# Altium PCB MainCard.PcbDoc
Units mil, origin at the board's own origin, x right, y up, seen from the top; angles counter-clockwise.
Board outline 6407.48 x 3828.74 mil, 2 copper layers (Top Layer, Bottom Layer); 29 components, 25 nets, 193 pads, 14 vias.
Unrouted connection lines stored in the file: 15.
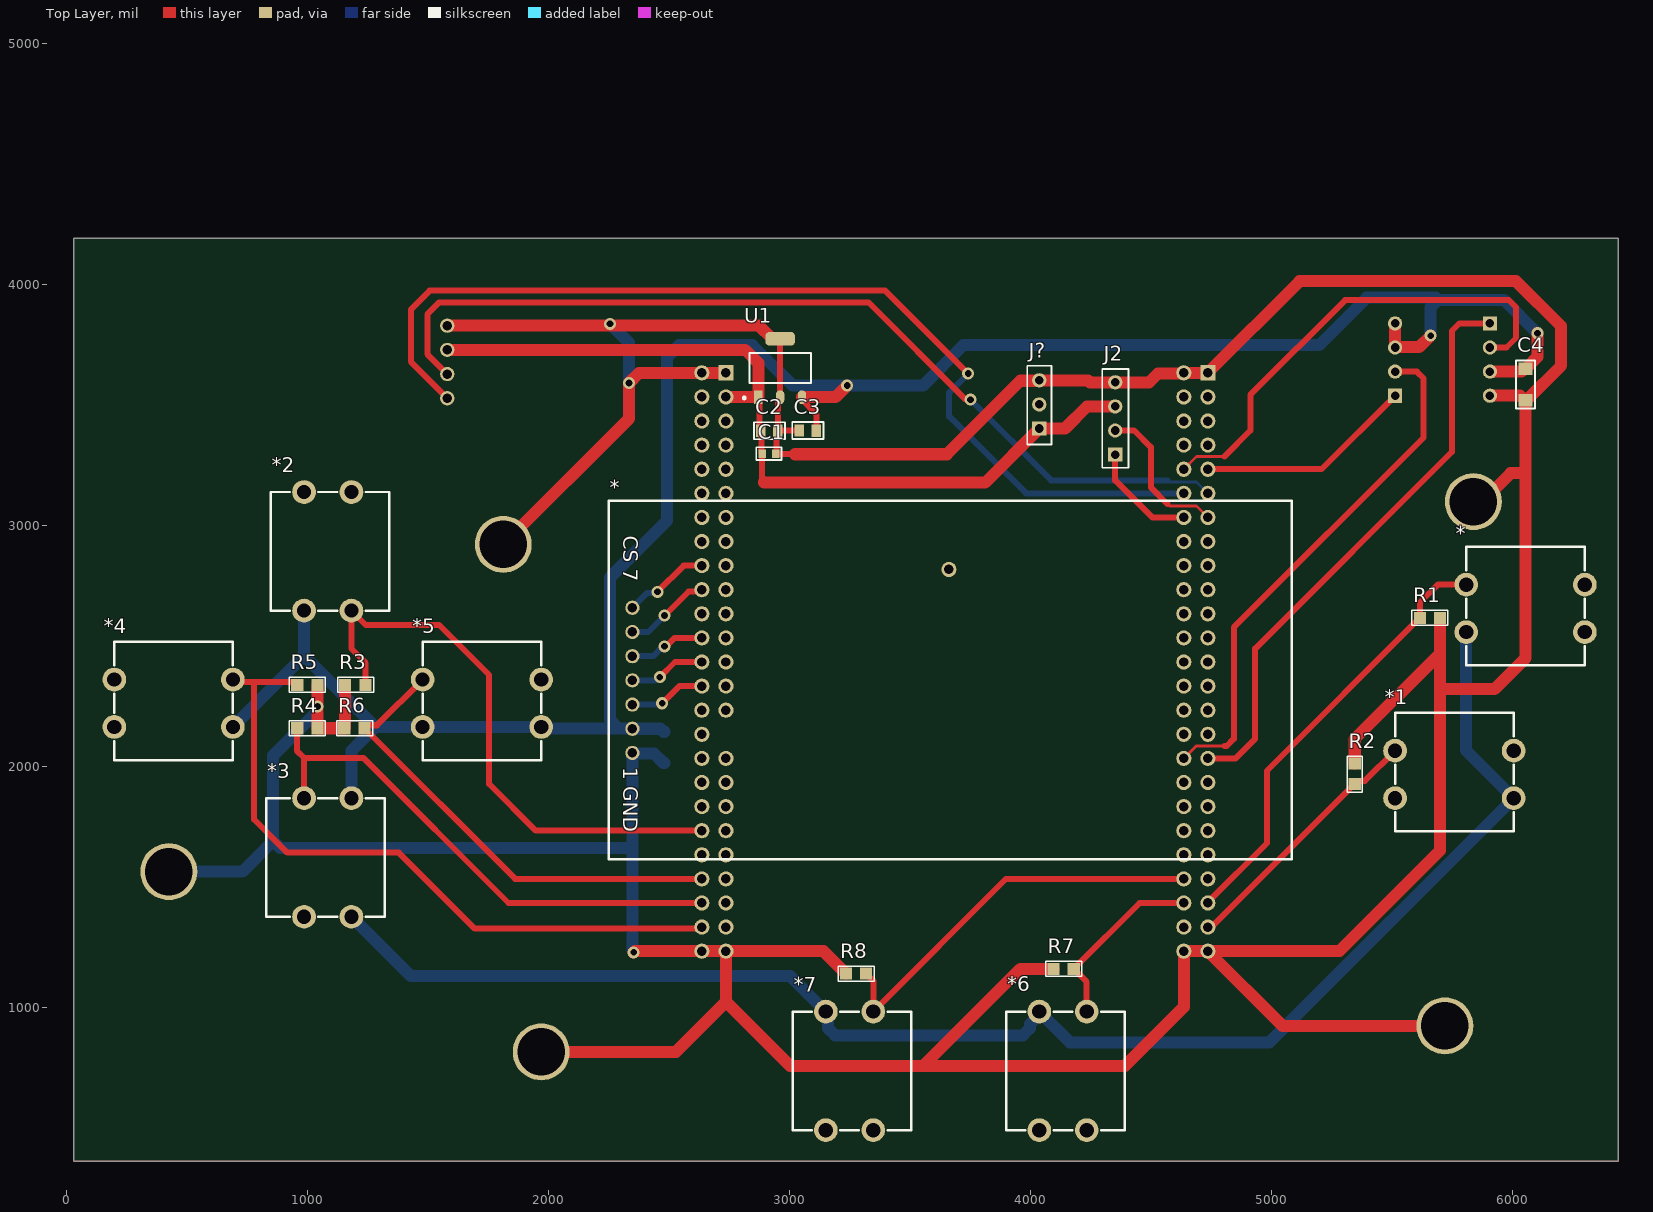
[diagram p0: Top Layer view]
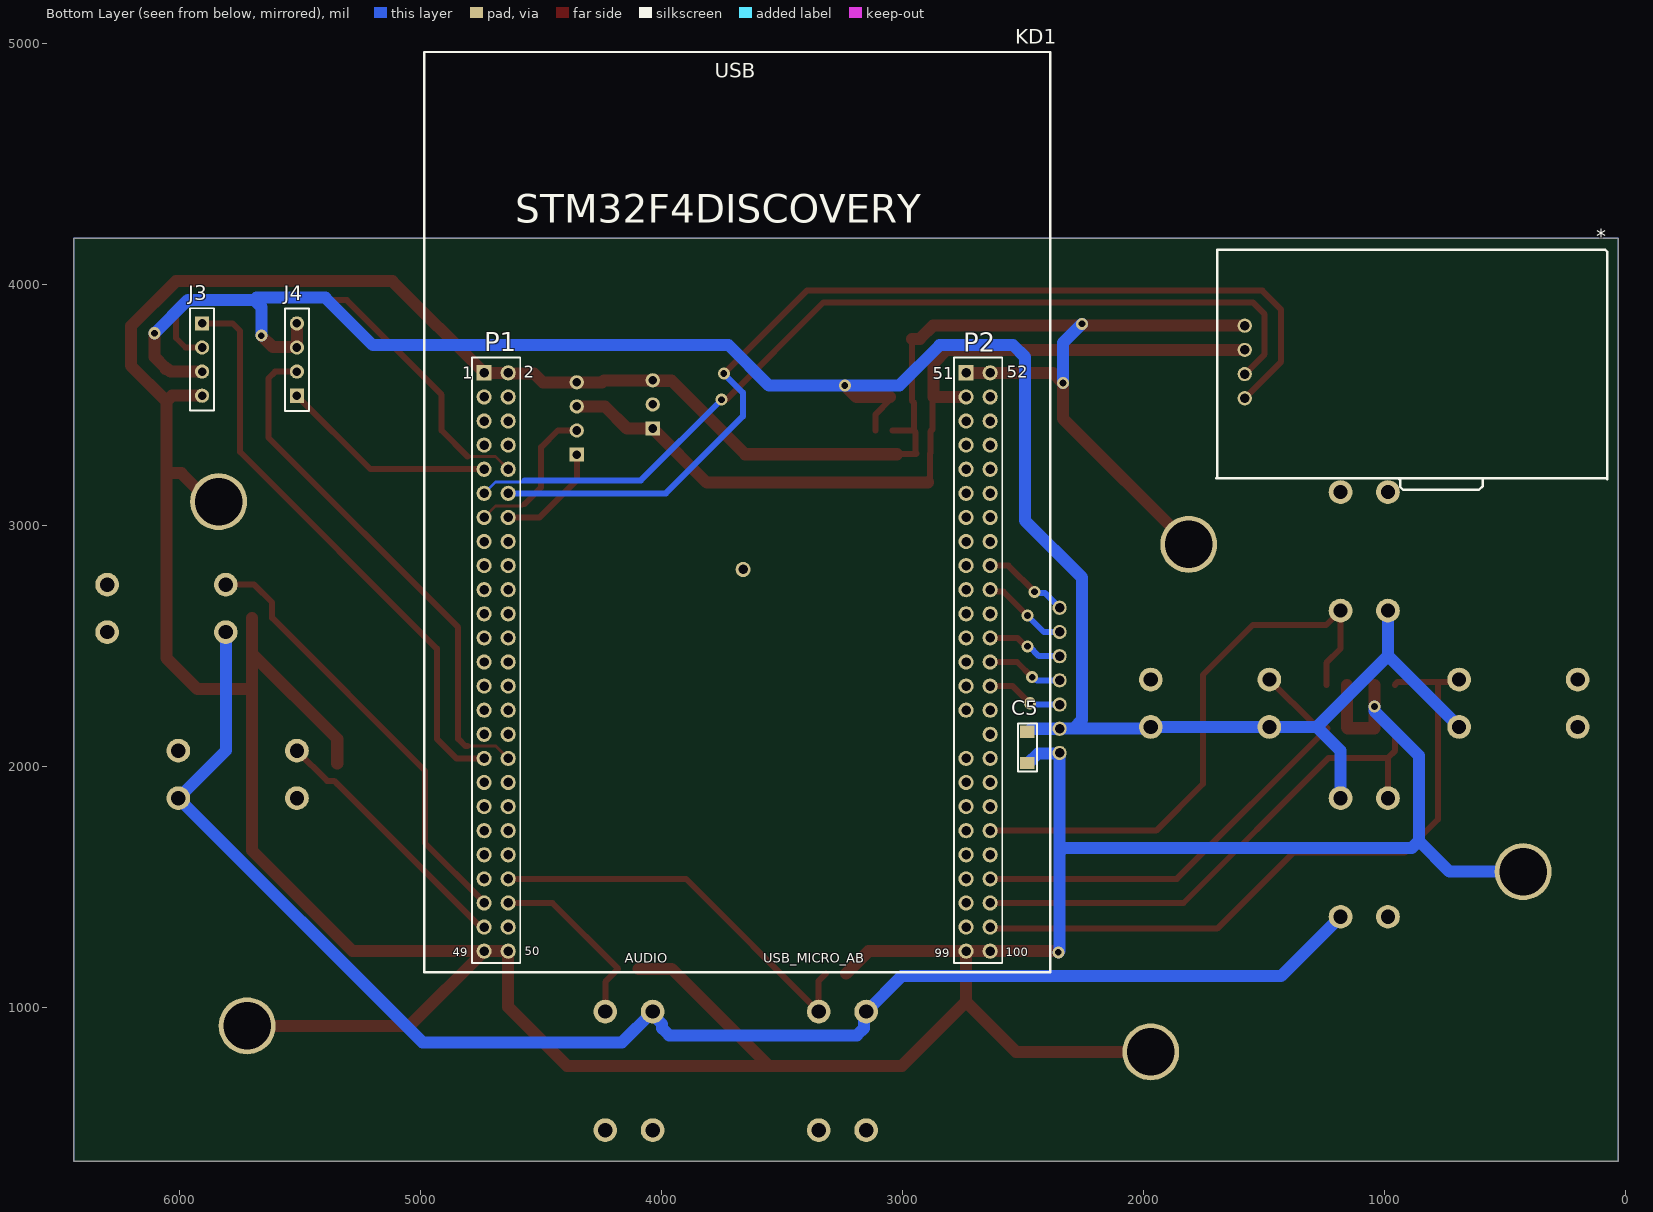
[diagram p1: Bottom Layer view, seen from below]
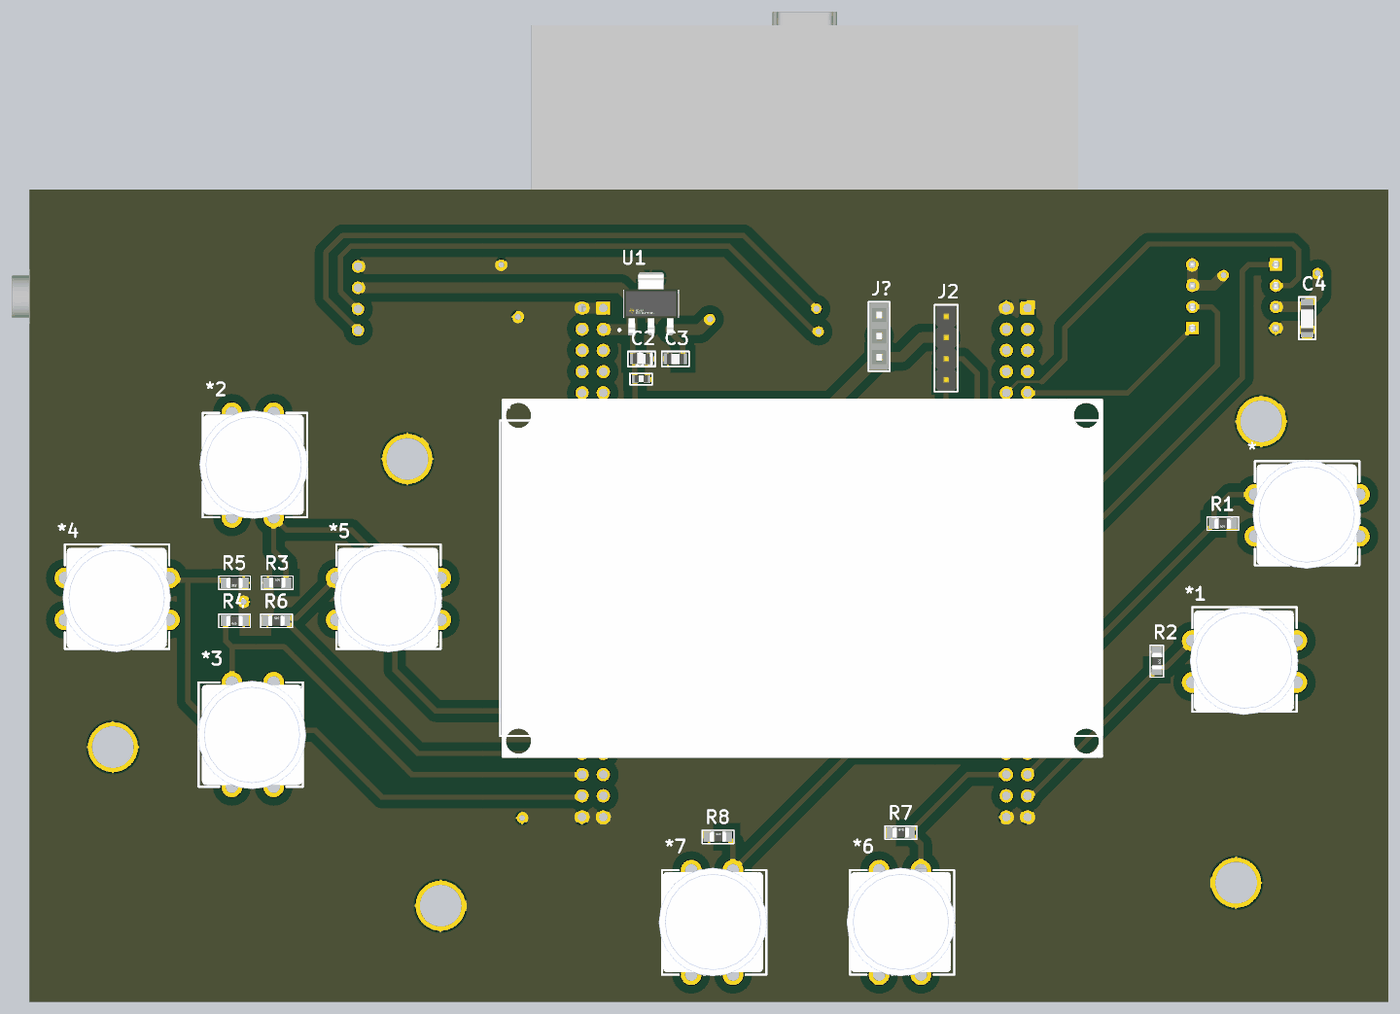
[diagram p2: 3D render of the assembled board from above, using the file's embedded part models]
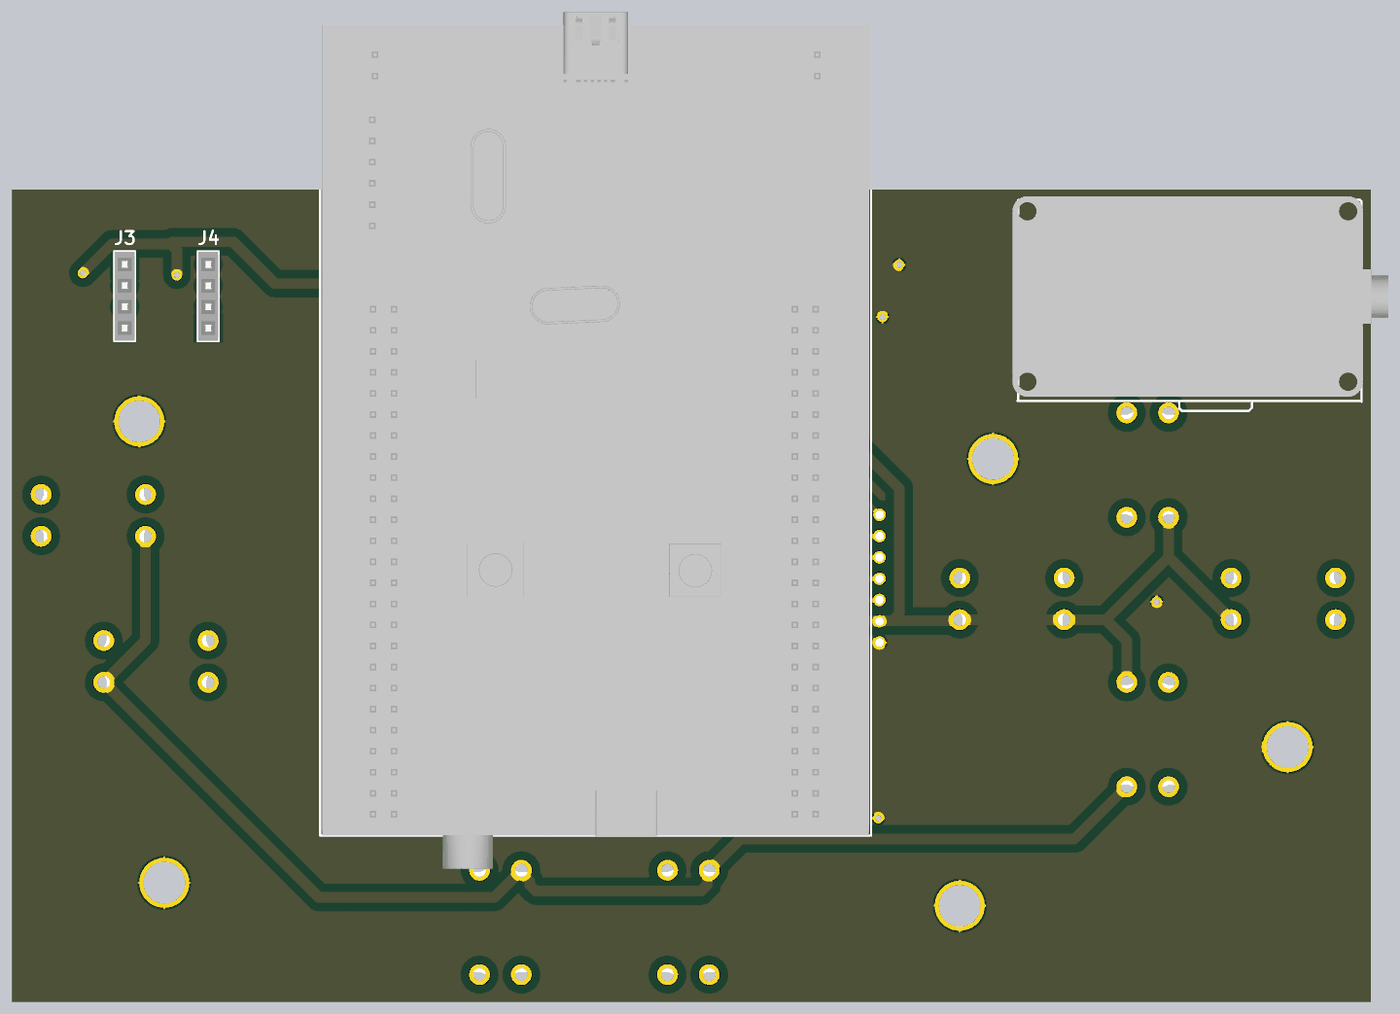
[diagram p3: 3D render of the assembled board from below, using the file's embedded part models]

## Layer stack, top to bottom
Top Solder: solder mask 0.4, Solder Resist, Dk 3.5
Top Layer: signal copper 1.4
Dielectric 1: dielectric 12.6, FR-4, Dk 4.8
Bottom Layer: signal copper 1.4
Bottom Solder: solder mask 0.4, Solder Resist, Dk 3.5

## Board outline
29.53,364.17 6437.01,364.17 6437.01,4192.91 29.53,4192.91

## Design rules (kind name [scope] priority, off if disabled: settings)
Clearance Clearance_1 [InNamedPolygon('BOTTOM_GND') Or  InNamedPolygon('TOP_GND')] p1: gap=40 ignorepadtopadclearanceinfootprint=FALSE
Clearance [All] p2: gap=10 ignorepadtopadclearanceinfootprint=FALSE except(0: Arc-Hole Track-Hole SMDPad-Hole THPad-Hole Via-Hole Fill-Hole Poly-Hole Region-Hole Text-Hole)
PolygonConnect [All] p1: connectstyle=Relief reliefconductorwidth=10 reliefentries=4 polygonreliefangle="90 Angle" airgapwidth=10
RoutingVias [All] p1: holewidth=28 width=50 viastyle="Through Hole" minholewidth=28 minwidth=50 maxholewidth=28 maxwidth=50
SolderMaskExpansion [All] p1: expansion=4
Width [All] p1: maxlimit=100 minlimit=10 preferedwidth=25
30 further rules are at their usual default settings.

## Classes and differential pairs
component class MainCard: * *1 *2 *3 *4 *5 *6 *7 C1 C2 C3 C4 C5 J2 J3 J4 J? KD1 R1 R2 R3 R4 R5 R6 R7 R8 U1

## Components (designator, comment, footprint, x,y, rotation, side; value= is the part's Value field where it differs from the comment)
* "BTN_A" BTN_R200_1 5807.09,2559.06 r0 top
* "calatex_mp3" "CALATEX MP3" 255.91,3838.58 r0 bottom
* "OLED_20704" OLED_20704 2465,2660 r180 top
*1 "BTN_B" BTN_R200_1 5511.81,1870.08 r0 top
*2 "BTN_TOP" BTN_R200_1 984.25,3140.44 r270 top
*3 "BTN_DOWN" BTN_R200_1 1181.1,1377.95 r90 top
*4 "BTN_LEFT" BTN_R200_1 196.85,2165.35 r0 top
*5 "BTN_RIGHT" BTN_R200_1 1476.38,2165.35 r0 top
*6 "BTN_START" BTN_R200_1 4035.43,984.25 r270 top
*7 "BTN_SELECT" BTN_R200_1 3149.61,984.25 r270 top
C1 "CMS_0603" CONDENSATEUR_CMS_0603 2941,3300 r180 top
C2 "CMS_0805" CONDENSATEUR_CMS_0805 2950.47,3394.61 r180 top value=10µF
C3 "CMS_0805" CONDENSATEUR_CMS_0805 3039.53,3395.39 r0 top value=33µF
C4 "CMS_1206" CONDENSATEUR_CMS_1206 6053.15,3521.57 r90 top value=100nF
C5 "CMS_1206" CONDENSATEUR_CMS_1206 2480.32,2145.67 r270 bottom value=100nF
J2 "BARRETTE_4 CONTACTS_1 RANGEE_MALE_DROITE" BARRETTE_4_M_D 4350.39,3295.67 r90 top
J3 "BARRETTE_4 CONTACTS_1 RANGEE_FEMELLE_DROITE" BARRETTE_4_F_D 5905.51,3840.16 r270 bottom (schematic designator W25L)
J4 "BARRETTE_4 CONTACTS_1 RANGEE_FEMELLE_DROITE" BARRETTE_4_F_D 5511.81,3540.16 r90 bottom (schematic designator W25R)
J? "BARRETTE 3 CONTACTS 1 RANGEE FEMELLE DROITE" BARRETTE_3_F_D 4035.43,3403.94 r90 top
KD1 "STM32F4DISCOVERY" STM32F4DISCOVERY 4735,3635 r180 bottom
R1 "RESISTANCE_CMS_0805" RESISTANCE_CMS_0805 5698.82,2618.11 r180 top value=10K
R2 "RESISTANCE_CMS_0805" RESISTANCE_CMS_0805 5344.49,2013.13 r270 top value=10K
R3 "RESISTANCE_CMS_0805" RESISTANCE_CMS_0805 1155,2340 r0 top value=10K
R4 "RESISTANCE_CMS_0805" RESISTANCE_CMS_0805 1040,2160 r180 top value=10K
R5 "RESISTANCE_CMS_0805" RESISTANCE_CMS_0805 1040,2340 r180 top value=10K
R6 "RESISTANCE_CMS_0805" RESISTANCE_CMS_0805 1151,2160 r0 top value=10K
R7 "RESISTANCE_CMS_0805" RESISTANCE_CMS_0805 4094.49,1161.42 r0 top value=10K
R8 "RESISTANCE_CMS_0805" RESISTANCE_CMS_0805 3232.93,1141.73 r0 top value=10K
U1 "LM3940IMP-3.3/NOPB" FP-DCY0004A-IPC_C 2960,3655 r90 top

## Footprints (in the part's own frame and the unit in brackets; to place one, negate y for a bottom-side part, rotate by r counter-clockwise, add the part's x,y. Pads: shape width x height; smd on the part's side, far side on the other; paste and mask are expansions set on the pad)
BARRETTE_3_F_D [mm] "BARRETTE 3 CONTACTS ; 1 RANGEE ; DROITE ; FEMELLE ; ESPACEMENT BROCHES = 2.54 mm"
  rect 1.5x1.5 hole 0.9: 1(0,0)
  round 1.5 hole 0.9: 2(2.54,0) 3(5.08,0)
  silkscreen extent -1.7,-1.27 6.61,1.27, body extent -1.56,-1.21 6.56,1.2, height 8.5
BARRETTE_4_F_D [mm] "BARRETTE 4 CONTACTS ; 1 RANGEE ; DROITE ; FEMELLE ; ESPACEMENT BROCHES = 2.54 mm"
  rect 1.5x1.5 hole 0.9: 1(0,0)
  round 1.5 hole 0.9: 2(2.54,0) 3(5.08,0) 4(7.62,0)
  silkscreen extent -1.6,-1.27 9.2,1.27, body extent -1.53,-1.21 9.13,1.2, height 8.5
BARRETTE_4_M_D [mm] "BARRETTE 4 CONTACTS ; 1 RANGEE ; DROIT ; MALE ; ESPACEMENT BROCHES = 2.54 mm"
  rect 1.5x1.5 hole 0.9: 1(0,0)
  round 1.5 hole 0.9: 2(2.54,0) 3(5.08,0) 4(7.62,0)
  silkscreen extent -1.38,-1.4 9.01,1.36, body extent -1.28,-1.3 8.88,1.24, height 10.1
BTN_R200_1 [mm]
  round 2.5 hole 1.5: 1(0,5) 1(12.5,5) 2(0,0) 2(12.5,0)
  silkscreen extent 0,-3.5 12.5,9, body extent -0.3,-3.9 12.7,9.1, height 12.31
"CALATEX MP3" [mm]
  round 1.5 hole 1: 1(33.6,7.85) 2(33.6,5.3) 3(33.6,2.75) 4(33.6,0.2)
  silkscreen extent -4.6,-7.8 36.6,17.5, body extent -7.8,-8.2 37.2,15.8, height 18
CONDENSATEUR_CMS_0603 [mm] "CONDENSATEUR CMS 0603 ; DIMENSIONS : 1.6mm x 0.86mm"
  rect 0.8x0.9 smd: 1(0,0) 2(1.422,0)
  silkscreen extent -0.62,-0.67 2.04,0.68, body extent -0.1,-0.46 1.5,0.4, height 0.85
CONDENSATEUR_CMS_0805 [mm] "CONDENSATEUR CMS 0805 ; DIMENSIONS : 2mm x 1.25mm"
  rect 1x1.3 smd: 1(0,0) 2(1.79,-0.01)
  silkscreen extent -0.74,-0.9 2.53,0.89, body extent -0.09,-0.67 1.91,0.64, height 0.73
CONDENSATEUR_CMS_1206 [mil] "CONDENSATEUR CMS 1206 ; DIMENSIONS : 3.2mm x 1.6mm"
  rect 51.18x60 smd: 1(0,0) 2(130,0)
  silkscreen extent -35,-39 165,39, body extent 0,-30 126,31, height 64
FP-DCY0004A-IPC_C [mm]
  rect 1.454x0.873 smd paste+0 mask+0: 1(-3.075,2.3)
  rrect100% 1.454x0.873 smd paste+0 mask+0: 2(-3.075,0) 3(-3.075,-2.3)
  rrect60% 1.454x3.132 smd paste+0 mask+0: 4(3.075,0)
  silkscreen extent -3.27,-3.25 1.6,3.9, body extent -3.9,-3.35 3.9,3.35, height 0.25
OLED_20704 [mm]
  round 1.5 hole 1: 1(3,15.3) 2(3,12.75) 3(3,10.2) 4(3,7.65) 5(3,5.1) 6(3,2.55) 7(3,0)
  silkscreen extent -66.5,-11.3 5.5,26.5, body extent -66.7,-13.9 5.3,29.1, height 15
RESISTANCE_CMS_0805 [mil] "RESISTANCE CMS 0805 ; DIMENSIONS : 2mm x 1.25mm"
  rect 50x50 smd: 1(0,0) 2(84,0)
  silkscreen extent -31,-31 118,31, body extent 4,-24 83,26, height 31
STM32F4DISCOVERY [mm] "KIT DE DEVELOPPEMENT"
  rect 1.6x1.6 hole 1: 1(0,0) 51(50.8,0)
  round 1.6 hole 1: 2(2.54,0) 3(0,-2.54) 4(2.54,-2.54) 5(0,-5.08) 6(2.54,-5.08) 7(0,-7.62) 8(2.54,-7.62) 9(0,-10.16) 10(2.54,-10.16) 11(0,-12.7) 12(2.54,-12.7) 13(0,-15.24) 14(2.54,-15.24) 15(0,-17.78) 16(2.54,-17.78) 17(0,-20.32) 18(2.54,-20.32) 19(0,-22.86) 20(2.54,-22.86) 21(0,-25.4) 22(2.54,-25.4) 23(0,-27.94) 24(2.54,-27.94) 25(0,-30.48) 26(2.54,-30.48) 27(0,-33.02) 28(2.54,-33.02) 29(0,-35.56) 30(2.54,-35.56) 31(0,-38.1) 32(2.54,-38.1) 33(0,-40.64) 34(2.54,-40.64) 35(0,-43.18) 36(2.54,-43.18) 37(0,-45.72) 38(2.54,-45.72) 39(0,-48.26) 40(2.54,-48.26) 41(0,-50.8) 42(2.54,-50.8) 43(0,-53.34) 44(2.54,-53.34) 45(0,-55.88) 46(2.54,-55.88) 47(0,-58.42) 48(2.54,-58.42) 49(0,-60.96) 50(2.54,-60.96) 52(53.34,0) 53(50.8,-2.54) 54(53.34,-2.54) 55(50.8,-5.08) 56(53.34,-5.08) 57(50.8,-7.62) 58(53.34,-7.62) 59(50.8,-10.16) 60(53.34,-10.16) 61(50.8,-12.7) 62(53.34,-12.7) 63(50.8,-15.24) 64(53.34,-15.24) 65(50.8,-17.78) 66(53.34,-17.78) 67(50.8,-20.32) 68(53.34,-20.32) 69(50.8,-22.86) 70(53.34,-22.86) 71(50.8,-25.4) 72(53.34,-25.4) 73(50.8,-27.94) 74(53.34,-27.94) 75(50.8,-30.48) 76(53.34,-30.48) 77(50.8,-33.02) 78(53.34,-33.02) 79(50.8,-35.56) 80(53.34,-35.56) 81(27.3,-20.725) 82(53.34,-38.1) 83(50.8,-40.64) 84(53.34,-40.64) 85(50.8,-43.18) 86(53.34,-43.18) 87(50.8,-45.72) 88(53.34,-45.72) 89(50.8,-48.26) 90(53.34,-48.26) 91(50.8,-50.8) 92(53.34,-50.8) 93(50.8,-53.34) 94(53.34,-53.34) 95(50.8,-55.88) 96(53.34,-55.88) 97(50.8,-58.42) 98(53.34,-58.42) 99(50.8,-60.96) 100(53.34,-60.96)
  silkscreen extent -6.33,-63.18 59.67,33.82, body extent -6.08,-67.14 59.42,35.42, height 24.7

## Part data
* *1 *2 *3 *4 *5 *6 *7: library part BTN_R200_1
C1: library part CONDENSATEUR_CMS_CER_0603, "CONDENSATEUR CMS CERAMIQUE 0603", Condo=0.47µF, Type=CMS_0603
C2 C3: library part CONDENSATEUR_CMS_CER_0805, "CONDENSATEUR CMS CERAMIQUE 0805", Type=CMS_0805
C4 C5: library part CONDENSATEUR_CMS_CER_1206, "CONDENSATEUR CMS CERAMIQUE 1206", Type=CMS_1206
J2: "BARRETTE 4 CONTACTS 1 RANGEE MALE DROITE", Type=UART
J3 J4: "BARRETTE 4 CONTACTS 1 RANGEE FEMELLE DROITE"
  J3: Type=W25L
  J4: Type=W25R
J?: library part "BARRETTE_3 CONTACTS_1 RANGEE_FEMELLE_DROITE", Type=Alimentation
KD1: "KIT DE DEVELOPPEMENT POUR MICROCONTROLEUR STM32F407VGT6", Type="KIT DE DEVELOPPEMENT"
R1 R2 R3 R4 R5 R6 R7 R8: "RESISTANCE CMS 0805", Type=CMS_0805
U1: library part CMP-0062-01788-4, "IC REG LINEAR 3.3V 1A SOT223-4", Case/Package=SOT-223, Current Rating=1A, Dropout Voltage=500mV, Max Input Voltage=7.5V, Max Operating Temperature=125°C, Max Output Voltage=3.3V, Min Input Voltage=4.5V, Min Operating Temperature=-40°C, Package Quantity=1000, Quiescent Current=15mA, Contact Plating=Tin, Height=1.6mm, Lead Free="Lead Free", Length=6.5mm, Max Output Current=1A, Max Supply Voltage=7.5V, Min Supply Voltage=4.5V, Mount="Surface Mount", Nominal Output Voltage=3.3V, Number of Outputs=1, Number of Pins=4, Number of Regulators=1, Output Configuration=Positive, Output Current=1A, Output Type=Fixed, Output Voltage=3.3V, Packaging="Tape and Reel", Polarity=Positive, Radiation Hardening=No, REACH SVHC="No SVHC", Series=-, Termination=SMD/SMT, Width=3.56mm

## Free pads (board coordinates)
  round 236.22 hole 196.85: 2(423.23,1564.96) 2(1811.02,2923.23) 2(1968.5,816.93) 2(5718.5,925.2) 2(5836.61,3100.39)

## Via types
v1: diameter 50, hole 28, Top Layer to Bottom Layer, 14 vias

## Nets (pads, with @x,y where several pads share a name; then routed paths per layer and width w, separated by ;. In a path a pad name is that pad's centre, name@x,y a point inside that pad or via, vN(x,y) a via of type N, cw(c..) or ccw(c..) an arc to the next point about the centre after c; other vN are vias at no path point)
3v: KD1.55
3v3: *1.2 *2.2 *3.2 *4.2 *5.2 *6.2 *7.2 *.2@2346.89,2158.03 *.2@5807.09,2559.06 *.2@6299.21,2559.06 C3.2 C4.2 C5.1 J3.3 J4.3 J4.4 U1.3 | length 15620.6
  Top Layer w25: U1.3 3050.55,3522.5 3110,3463.06 C3.2
  Top Layer w50: U1.3 3189.45,3533.94 v1(3238.19,3582.68) ; J4.4 J4.3 5513.54,3741.89 5611.97,3741.89 v1(5659.45,3789.37) ; J3.3 6037.32,3640.16 6048.74,3651.57 C4.2 6057.56,3651.57 6058.15,3652.17 6058.15,3656.57 6102.36,3700.79 v1(6102.36,3799.21)
  Bottom Layer w50: *4.2@688.98,2165.35 984.25,2460.63 ; *2.2@984.25,2648.31 984.25,2460.63 ; *3.2@1181.1,1377.95 1427.17,1131.89 3001.97,1131.89 3149.61,984.25 3158.87,974.99 3158.87,915.12 3188.16,885.83 3966.77,885.83 3996.06,915.12 3996.06,931.78 4035.43,971.15 4035.43,984.25 4163.39,856.3 4990.16,856.3 6003.94,1870.08 5807.09,2066.93 *.2@5807.09,2559.06 ; *3.2@1181.1,1870.08 1181.1,2066.93 1279.53,2165.35 ; C5.1 2475.91,2145.67 2463.54,2158.03 2346.89,2158.03 2345.16,2159.76 2288.82,2159.76 ; v1(5659.45,3789.37) 5659.45,3907.72 5688.74,3937.01 ; v1(6102.36,3799.21) 5964.57,3937.01 5688.74,3937.01 ; 984.25,2460.63 1279.53,2165.35 ; 1279.53,2165.35 1476.38,2165.35 1968.5,2165.35 1974.09,2159.76 2288.82,2159.76 ; 2288.82,2159.76 2253.94,2194.64 2253.94,2785.43 2490.16,3021.65 2490.16,3700.79 2539.37,3750 2844.49,3750 3011.81,3582.68 v1(3238.19,3582.68) 3553.15,3582.68 3720.47,3750 5196.85,3750 5393.7,3946.85 5678.9,3946.85 5688.74,3937.01
5v: *.3@1578.74,3730.32 C1.2 C2.2 J2.3 J?.1 KD1.53 U1.1 | length 3542.7
  Top Layer w25: U1.1 2874.14,3529.24 2874.14,3400.86 C2.2 2882.5,3392.5 2882.5,3302.5 C1.2 2885,3190.12 2893.7,3181.42
  Top Layer w50: *.3@1578.74,3730.32 2814.96,3730.32 2869.45,3675.83 U1.1 2736.06,3533.94 KD1.53 ; 2893.7,3181.42 2893.7,3179.13 3810.63,3179.13 J?.1 4142.13,3403.94 4233.86,3495.67 J2.3
BTN_A: *.1@5807.09,2755.91 *.1@6299.21,2755.91 KD1.45 R1.2 | length 1834.2
  Top Layer w25: KD1.45 4735,1437.76 4980.31,1683.07 4980.31,1983.61 R1.2 5614.82,2681.75 5688.98,2755.91 *.1@5807.09,2755.91
BTN_B: *1.1 KD1.47 R2.2 | length 1080
  Top Layer w25: KD1.47 4742.27,1342.27 4757.62,1342.27 R2.2 5356.99,1941.63 5386.52,1941.63 *1.1@5511.81,2066.93
BTN_DOWN: *3.1 KD1.96 R4.2 | length 2203
  Top Layer w25: R4.2 954.72,2158.72 954.72,2066.93 984.25,2037.4 ; *3.1@984.25,1870.08 984.25,2037.4 ; KD1.96 1832.72,1435 1230.32,2037.4 984.25,2037.4
BTN_LEFT: *4.1 KD1.98 R5.2 | length 2893.4
  Top Layer w25: *4.1@688.98,2362.2 700.08,2351.1 777.56,2351.1 ; R5.2 944.9,2351.1 777.56,2351.1 ; KD1.98 2628.74,1328.74 1692.91,1328.74 1377.95,1643.7 915.35,1643.7 777.56,1781.5 777.56,2351.1
BTN_RIGHT: *5.1 KD1.94 R6.2 | length 1984
  Top Layer w25: *5.1@1476.38,2362.2 1286.67,2172.5 1247.5,2172.5 R6.2 1860,1535 KD1.94
BTN_SELECT: *7.1 KD1.44 R8.2 | length 1686.4
  Top Layer w25: R8.2 3346.46,1112.2 3346.46,984.25 3897.2,1535 KD1.44
BTN_START: *6.1 KD1.46 R7.2 | length 769.3
  Top Layer w25: *6.1@4232.28,984.25 4232.28,1107.62 R7.2 4452.07,1435 KD1.46
BTN_TOP: *2.1 KD1.90 R3.2 | length 2430.7
  Top Layer w25: R3.2 1240.16,2341.16 1240.16,2431.1 1181.1,2490.16 1181.1,2648.31 1240.83,2588.58 1545.28,2588.58 1751.97,2381.89 1751.97,1929.13 1946.1,1735 KD1.90
CS: *.7 KD1.68 | length 360.6
  Top Layer w25: v1(2450.79,2726.38) 2559.41,2835 KD1.68
  Bottom Layer w25: *.7 2408.48,2721.59 2446,2721.59 v1(2450.79,2726.38)
CS_2: J3.1 KD1.33 | length 2431.4
  Top Layer w25: KD1.33 4849.96,2035 4931.1,2116.14 4931.1,2490.16 5748.03,3307.09 5748.03,3809.06 5779.13,3840.16 J3.1
DC: *.6 KD1.70 | length 361.2
  Top Layer w25: v1(2480.32,2627.95) 2580.09,2727.73 2627.73,2727.73 KD1.70
  Bottom Layer w25: *.6 2347.44,2559.06 2411.42,2559.06 v1(2480.32,2627.95)
GND: *.1@2346.89,2057.64 *.4@1578.74,3830.71 C1.1 C2.1 C3.1 C4.1 C5.2 J2.4 J3.4 J?.3 KD1.1 KD1.2 KD1.49 KD1.50 KD1.51 KD1.52 KD1.99 KD1.100 pad.2 R1.1 R2.1 R3.1 R4.1 R5.1 R6.1 R7.1 R8.1 U1.2 U1.4 | length 22498.9
  Top Layer w25: U1.4 U1.2 2960,3519.96 2950.47,3510.44 C2.1 ; 3021.65,3297.24 2943.76,3297.24 C1.1 2944.25,3303.25 2944.25,3388.38 C2.1 ; C3.1 2951.26,3395.39 C2.1
  Top Layer w50: R5.1 v1(1040,2250) R4.1 R6.1 1155,2164 R3.1 ; *.4@1578.74,3830.71 2872.32,3830.71 2926.97,3776.06 U1.4 ; pad.2@1811.02,2923.23 2332.68,3444.88 v1(2332.68,3592.52) 2375.16,3635 KD1.52 KD1.51 ; pad.2@1968.5,816.93 2527.09,816.93 2735,1024.84 ; v1(2352.36,1230.32) 2357.05,1235 KD1.100 KD1.99 ; 3021.65,3297.24 3651.57,3297.24 3956.54,3602.2 4033.7,3602.2 J?.3 4237.6,3603.94 4245.87,3595.67 J2.4 4491.34,3595.67 4528.5,3632.83 4632.83,3632.83 KD1.2 KD1.1 5115.75,4015.75 6013.78,4015.75 6200.79,3828.74 6200.79,3664.8 C4.1@6057.56,3521.57 ; R8.1 3139.66,1235 KD1.99 ; R7.1 3956.69,1161.42 3554.18,758.9 ; R2.1 5344.49,2116.14 5698.82,2470.47 ; R1.1 5698.82,2470.47 ; pad.2@5718.5,925.2 5044.8,925.2 KD1.49 ; pad.2@5836.61,3100.39 5873.49,3100.39 5991.6,3218.5 6053.15,3218.5 ; J3.4 6030.16,3540.16 C4.1@6048.74,3521.57 ; C4.1 6053.15,3218.5 ; 2735,1024.84 3000.94,758.9 3554.18,758.9 ; 2735,1024.84 KD1.99 ; 3554.18,758.9 4390.79,758.9 4635,1003.11 KD1.50 KD1.49 ; KD1.49 5280.28,1235 5698.82,1653.54 5698.82,2322.83 ; 5698.82,2322.83 5698.82,2470.47 ; 5698.82,2322.83 5925.2,2322.83 6053.15,2450.79 6053.15,3218.5
  Bottom Layer w50: pad.2@423.23,1564.96 728.58,1564.96 856.3,1692.68 ; v1(1040,2250) 1040,2230.94 856.3,2047.24 856.3,1692.68 ; v1(2253.94,3838.58) 2332.68,3759.84 v1(2332.68,3592.52) ; v1(2352.36,1230.32) 2346.89,1235.79 2346.89,1646.71 ; C5.2 2475.91,2015.67 2435.67,2055.91 2348.62,2055.91 2346.89,2057.64 2346.89,1646.71 ; 856.3,1692.68 885.59,1663.39 2330.22,1663.39 2346.89,1646.71
MISO_2: J3.2 KD1.10 | length 2020.4
  Top Layer w12: KD1.10 4687.4,3287.4 4803.15,3287.4
  Top Layer w25: 4803.15,3287.4 4911.42,3395.67 4911.42,3543.31 5304.61,3936.5 5984.76,3936.5 6013.78,3907.48 6013.78,3779.53 5974.41,3740.16 J3.2
MOSI_2: J4.1 KD1.9 | length 903.2
  Top Layer w25: KD1.9 5206.65,3235 J4.1
MP3_RX: *.1@1578.74,3529.53 KD1.12 | length 4235
  Top Layer w25: *.1@1578.74,3529.53 1427.17,3681.1 1427.17,3897.64 1505.91,3976.38 3395.67,3976.38 v1(3740.16,3631.89)
  Bottom Layer w25: v1(3740.16,3631.89) 3661.42,3553.15 3661.42,3454.72 3981.14,3135 KD1.12
MP3_TX: *.2@1578.74,3629.92 KD1.11 | length 3869.7
  Top Layer w25: *.2@1578.74,3629.92 1496.06,3712.6 1496.06,3877.95 1545.28,3927.17 3326.77,3927.17 3730.32,3523.62 v1(3750,3523.62)
  Bottom Layer w12: 4566.93,3188.98 4573.41,3182.5 4687.5,3182.5 KD1.11
  Bottom Layer w25: v1(3750,3523.62) 4084.65,3188.98 4566.93,3188.98
RES: *.5 KD1.74 | length 319.5
  Top Layer w25: v1(2480.32,2500) 2487.08,2500 2522.08,2535 KD1.74
  Bottom Layer w25: *.5 2432.76,2459.21 2473.55,2500 v1(2480.32,2500)
SCL: *.3@2346.89,2258.43 KD1.78 | length 319.8
  Top Layer w25: v1(2470.47,2263.78) 2541.69,2335 KD1.78
  Bottom Layer w25: *.3@2346.89,2258.43 2413.92,2258.43 2414.49,2259 2465.69,2259 v1(2470.47,2263.78)
SCLK_2: J4.2 KD1.34 | length 2193
  Top Layer w12: KD1.34 4686.61,2086.61 4803.15,2086.61
  Top Layer w25: 4803.15,2086.61 4812.99,2086.61 4842.52,2116.14 4842.52,2578.74 5629.92,3366.14 5629.92,3612.2 5601.97,3640.16 J4.2
SDA: *.4@2346.89,2358.82 KD1.76 | length 319.7
  Top Layer w25: v1(2460.63,2372.05) 2523.58,2435 KD1.76
  Bottom Layer w25: *.4@2346.89,2358.82 2440.64,2358.82 2453.86,2372.05 v1(2460.63,2372.05)
UA_RX: J2.2 KD1.13 | length 632
  Top Layer w12: 4566.93,3090.55 4574.98,3082.5 4687.5,3082.5 KD1.13
  Top Layer w25: J2.2 4429.13,3395.67 4498.03,3326.77 4498.03,3159.45 4566.93,3090.55
UA_TX: J2.1 KD1.14 | length 455.1
  Top Layer w25: J2.1 4350.39,3188.98 4504.37,3035 KD1.14
pads on no net: J?.2 KD1.3 KD1.4 KD1.5 KD1.6 KD1.7 KD1.8 KD1.15 KD1.16 KD1.17 KD1.18 KD1.19 KD1.20 KD1.21 KD1.22 KD1.23 KD1.24 KD1.25 KD1.26 KD1.27 KD1.28 KD1.29 KD1.30 KD1.31 KD1.32 KD1.35 KD1.36 KD1.37 KD1.38 KD1.39 KD1.40 KD1.41 KD1.42 KD1.43 KD1.48 KD1.54 KD1.56 KD1.57 KD1.58 KD1.59 KD1.60 KD1.61 KD1.62 KD1.63 KD1.64 KD1.65 KD1.66 KD1.67 KD1.69 KD1.71 KD1.72 KD1.73 KD1.75 KD1.77 KD1.79 KD1.80 KD1.81 KD1.82 KD1.83 KD1.84 KD1.85 KD1.86 KD1.87 KD1.88 KD1.89 KD1.91 KD1.92 KD1.93 KD1.95 KD1.97

## Polygon pours and split planes (outlines as drawn)
GND on Top Layer "TOP_GND" (solid, shelved, pour order 2): 29.53,4192.91 6437.01,4192.91 6437.01,364.17 29.53,364.17
GND on Bottom Layer "BOTTOM_GND" (solid, shelved, pour order 4): 29.53,4192.91 6437.01,4192.91 6437.01,364.17 29.53,364.17

## Text inside footprints (layer, text, board x,y; h text height)
*: Top Overlay "1 GND" at 2309.49,1998.58 h60 r270; Top Overlay "CS 7" at 2308.5,2958.23 h60 r270
KD1: Bottom Overlay "AUDIO" at 4152.32,1186.18 h39.37; Bottom Overlay "USB_MICRO_AB" at 3577.52,1186.18 h39.37; Bottom Overlay "USB" at 3778.31,4859.41 h60; Bottom Overlay "52" at 2565.71,3615.32 h50; Bottom Overlay "51" at 2872.8,3607.44 h50; Bottom Overlay "100" at 2569.65,1213.74 h35.43; Bottom Overlay "P2" at 2746.81,3721.61 h78.74; Bottom Overlay "P1" at 4735,3725.55 h78.74; Bottom Overlay "1" at 4825.55,3611.38 h50; Bottom Overlay "2" at 4569.65,3615.32 h50; Bottom Overlay "99" at 2864.92,1209.8 h35.43; Bottom Overlay "49" at 4864.92,1213.74 h35.43; Bottom Overlay "50" at 4565.71,1217.68 h35.43